# EAGLE board InkTime (EAGLE 9.7.0)
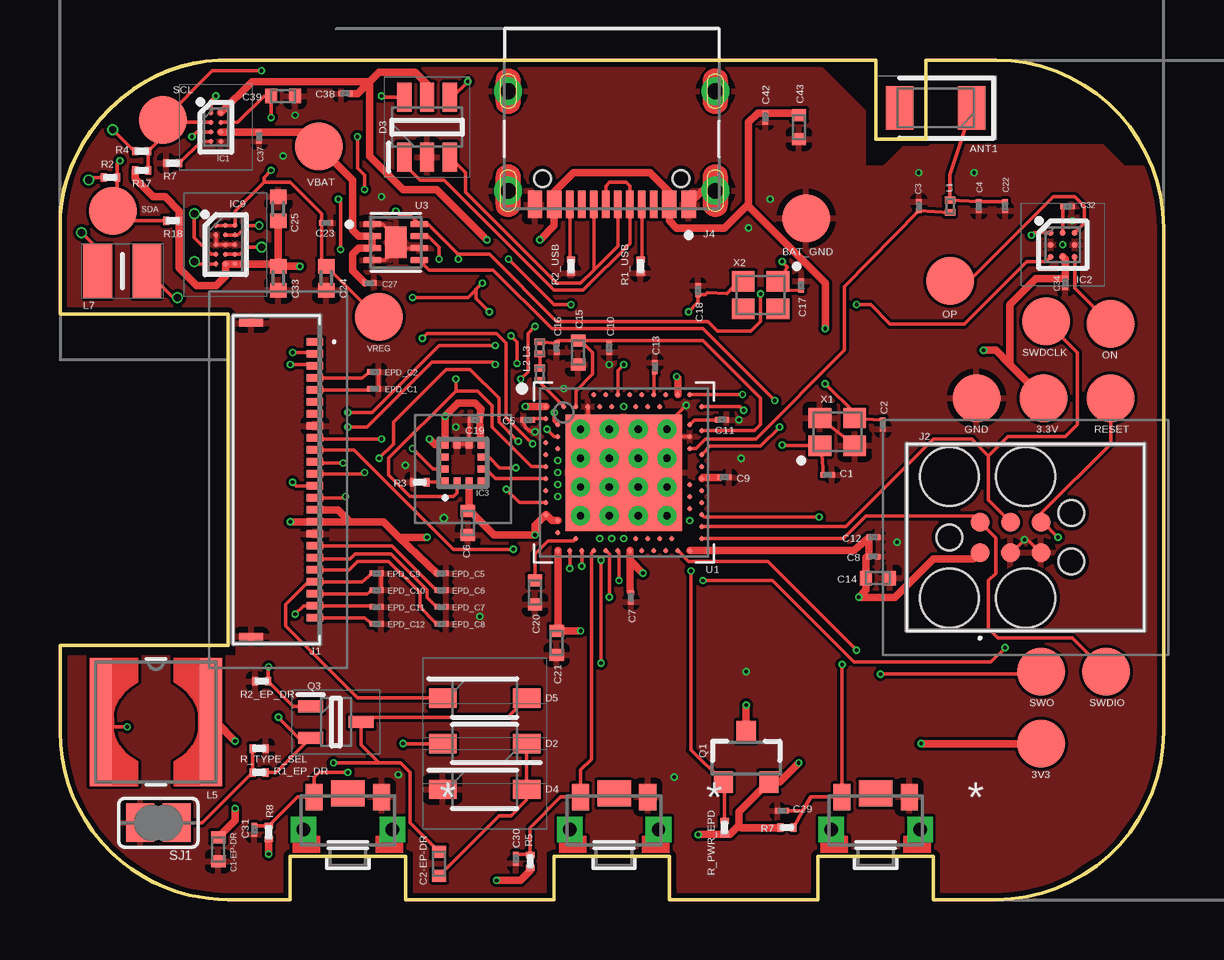
[diagram p0: board, top side]
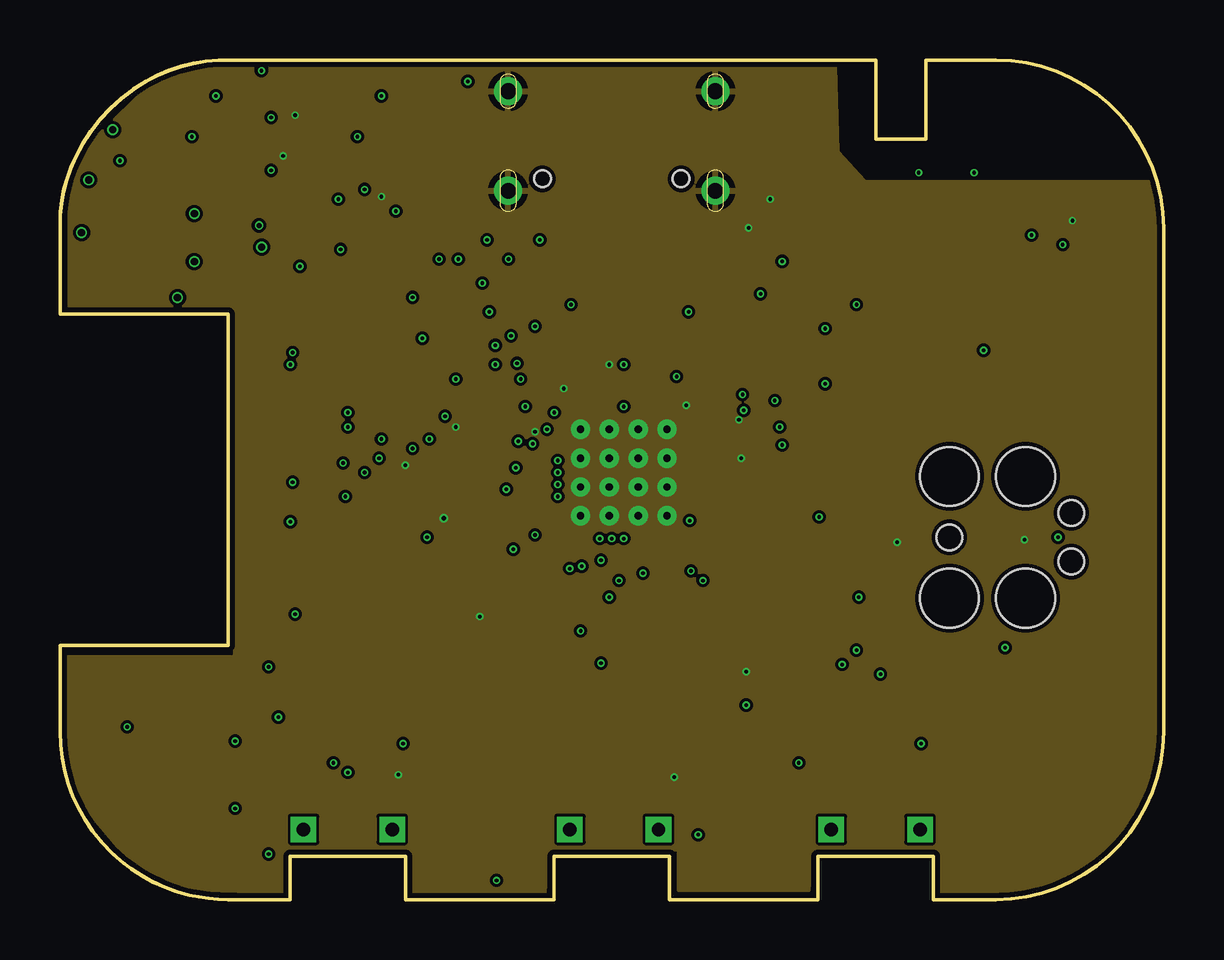
[diagram p1: board, inner layer Route2]
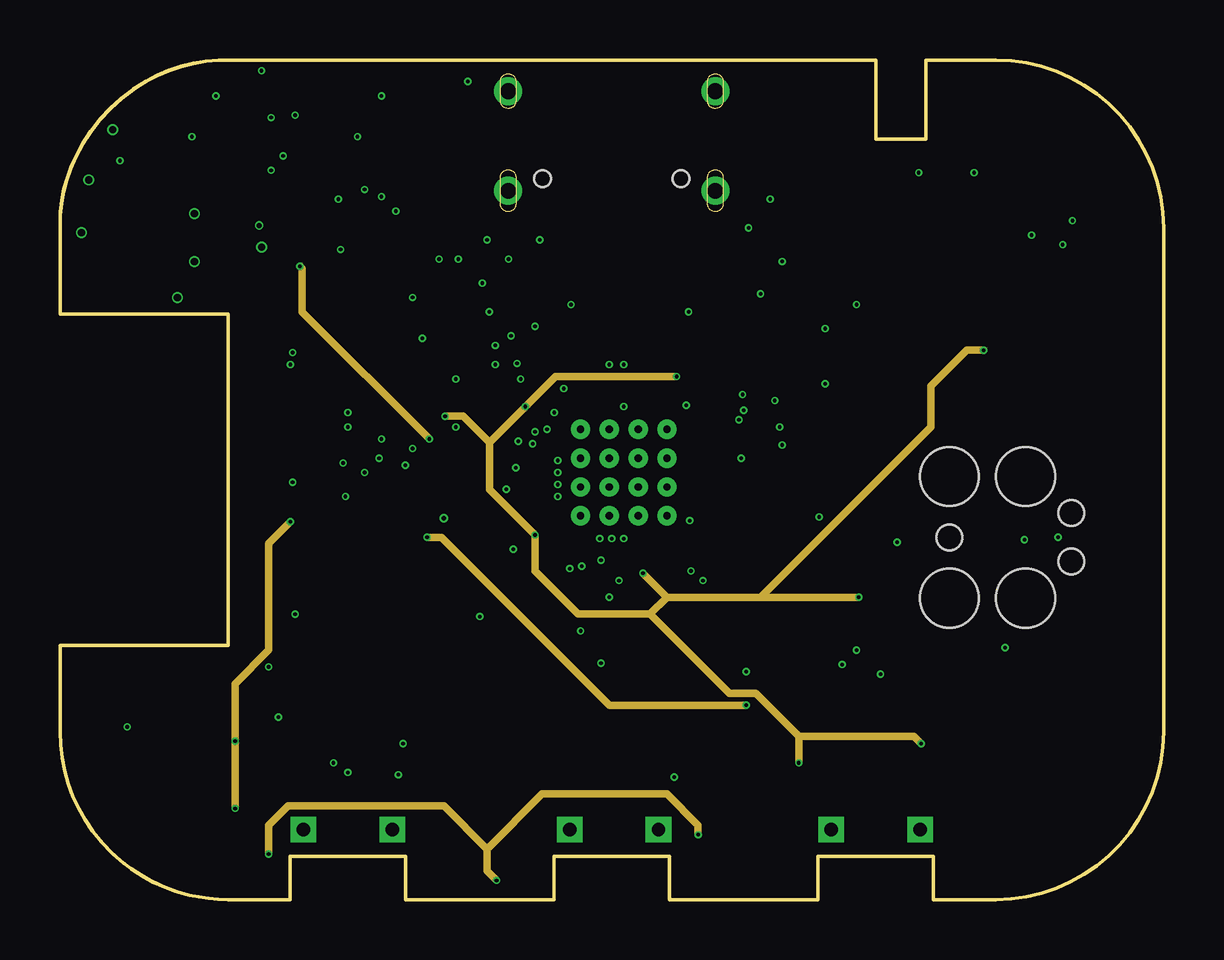
[diagram p2: board, inner layer Route15]
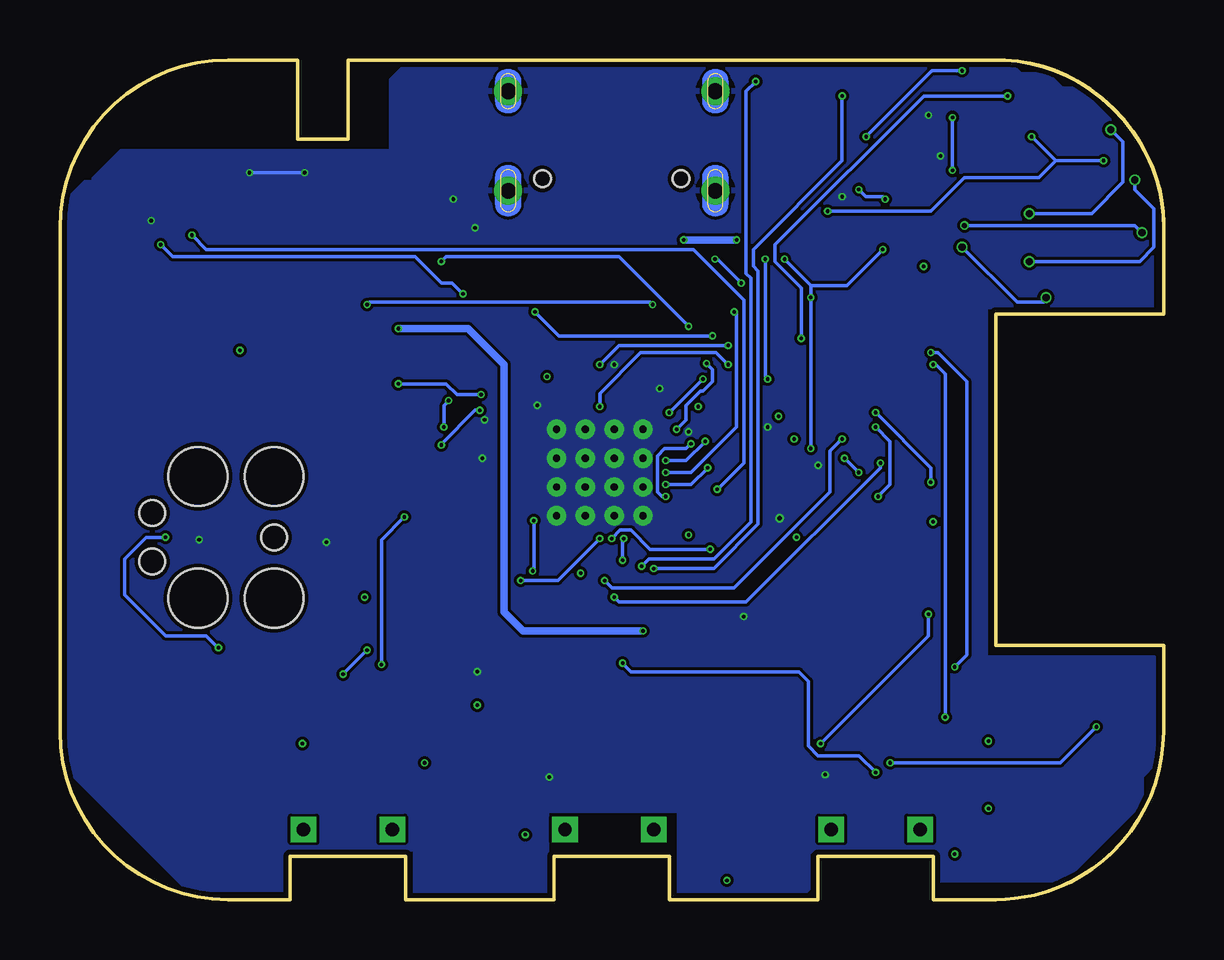
[diagram p3: board, bottom side, seen from below]

Size 46 x 35 mm. Coordinates in mm from the lower left corner, seen from the top.
Outline: 0,28 0,24.4 7,24.4 7,10.6 0,10.6 0,7
Outline: 7,35 arc3 6.6,34.99
Outline: 6.6,34.99 arc26 3.59,34.11
Outline: 3.59,34.11 arc36 0.65,30.95
Outline: 0.65,30.95 arc25 0,28
Outline: 0,7 arc32 1.04,3.32
Outline: 1.04,3.32 arc45 5.39,0.19
Outline: 5.39,0.19 arc13 7,0
Outline: 7,35 34,35 34,31.7 36.1,31.7 36.1,35 39,35 arc-90 46,28 46,7 arc-90 39,0 36.4,0 36.4,1.8 31.6,1.8 31.6,0 25.4,0 25.4,1.8 20.6,1.8 20.6,0 14.4,0 14.4,1.8 9.6,1.8 9.6,0 7,0
Outline: 7,35 6.6,34.99
Outline: 6.6,34.99 arc29 3.59,34.11
Outline: 3.59,34.11 arc33 0.65,30.95
Outline: 0.65,30.95 arc26 0,28.2 0,28
Outline: 0,7 arc32 1.04,3.32
Outline: 1.04,3.32 arc23 2.98,1.27 arc22 5.39,0.19
Outline: 5.39,0.19 arc13 7,0
Copper layers (1+2*15+16): Top 0.035mm / dielectric 1.6mm / Route2 0.035mm / dielectric 0.15mm / Route15 0.035mm / dielectric 0.2mm / Bottom 0.035mm
Design rules "jlcpcb-2layers.dru *": minimum track width 5mil, minimum drill 0.15mm, track to track 5mil, track to pad 5mil, pad to pad 5mil, via to via 5mil, smd to smd 5mil, copper to edge 0.2mm, drill to drill 0.15mm, minimum pad ring 10mil, minimum via ring 0.075mm, stop-mask expansion 4mil, vias tented up to drill 999mm, thermal gap 10mil

## Footprints (pad centres in the part's own frame; a part is rotated, then mirrored left to right if it is on the bottom)
HECTOR_WATCH_1_TP20R = smd 2 x 2: TP 0,0
2450AT18B100E_ANTC3216X140N = smd 1.15 x 1.8: 1 -1.5,0; 2 1.5,0
GRM011R60J152KE01L_2_CAPC0201X13N = smd 0.22 x 0.23: 1 -0.185,0; 2 0.185,0
NORDIC_NRF_2_RESC0402_L = smd 0.5 x 0.6: 1 -0.5,0; 2 0.5,0
PERFECT_0402_0402 = smd 0.6 x 0.7: 1 -0.5,0; 2 0.5,0
ESP32_C6_LIBRARY_5_SOD3716X135N = smd 1.15 x 0.8: 1 -1.75,0; 2 1.75,0
ESP32_C6_LIBRARY_3_SOT95P280X145-6N = smd 1.2 x 0.6: 1 -1.25,0.95; 2 -1.25,0; 3 -1.25,-0.95; 4 1.25,-0.95; 5 1.25,0; 6 1.25,0.95
BQ25180YBGR_BGA8C40P2X4_100X155X50 = smd 0.2 x 0.2: A1 -0.2,0.6; A2 0.2,0.6; B1 -0.2,0.2; B2 0.2,0.2; C1 -0.2,-0.2; C2 0.2,-0.2; D1 -0.2,-0.6; D2 0.2,-0.6
DRV2605YZFR_BGA9C50P3X3_144X144X62 = smd 0.25 x 0.25: A1 -0.5,0.5; A2 0,0.5; A3 0.5,0.5; B1 -0.5,0; B2 0,0; B3 0.5,0; C1 -0.5,-0.5; C2 0,-0.5; C3 0.5,-0.5
BMA423_BMA423 = smd 0.3 x 0.35: 1 -0.75,-0.775; 2 -0.25,-0.775; 3 0.25,-0.775; 4 0.75,-0.775; 7 0.75,0.775; 8 0.25,0.775; 9 -0.25,0.775; 10 -0.75,0.775 | smd 0.35 x 0.3: 5 0.775,-0.25; 6 0.775,0.25; 11 -0.775,0.25; 12 -0.775,-0.25
RT6160AWSC_BGA15C40P3X5_140X230X60 = smd 0.216 x 0.216: A1 -0.4,0.8; A2 0,0.8; A3 0.4,0.8; B1 -0.4,0.4; B2 0,0.4; B3 0.4,0.4; C1 -0.4,0; C2 0,0; C3 0.4,0; D1 -0.4,-0.4; D2 0,-0.4; D3 0.4,-0.4; E1 -0.4,-0.8; E2 0,-0.8; E3 0.4,-0.8
503480-2400_5034802400 = smd 0.3 x 0.7: 1 -5.75,1.525; 2 -5.25,1.525; 3 -4.75,1.525; 4 -4.25,1.525; 5 -3.75,1.525; 6 -3.25,1.525; 7 -2.75,1.525; 8 -2.25,1.525; 9 -1.75,1.525; 10 -1.25,1.525; 11 -0.75,1.525; 12 -0.25,1.525; 13 0.25,1.525; 14 0.75,1.525; 15 1.25,1.525; 16 1.75,1.525; 17 2.25,1.525; 18 2.75,1.525; 19 3.25,1.525; 20 3.75,1.525; 21 4.25,1.525; 22 4.75,1.525; 23 5.25,1.525; 24 5.75,1.525 | smd 0.3 x 1: MP1 -6.54,-1.125; MP2 6.54,-1.125
TC2030-IDC_TC2030IDC = smd 0.783 x 0.783: 1 -0.953,-0.635; 2 -0.953,0.635; 3 0.317,-0.635; 4 0.317,0.635; 5 1.588,-0.635; 6 1.588,0.635 | hole 2.451: -2.223,-2.54; -2.223,2.54; 0.952,-2.54; 0.952,2.54 | hole 1.067: -2.223,0; 2.857,-1.016; 2.857,1.016
KH-TYPE-C-16P_KINGHELM_KH-TYPE-C-16P = smd 0.6 x 1.15: A1_B12 -3.2,4.725; A4_B9 -2.4,4.725; A9_B4 2.4,4.725; A12_B1 3.2,4.725 | smd 0.3 x 1.15: A5 -1.25,4.725; A6 -0.25,4.725; A7 0.25,4.725; A8 1.25,4.725; B5 1.75,4.725; B6 0.75,4.725; B7 -0.75,4.725; B8 -1.75,4.725 | drill 0.65 pad 1.05: SH1 -4.32,0; SH2 4.32,0; SH3 -4.32,4.15; SH4 4.32,4.15 | hole 0.7: -2.89,3.65; 2.89,3.65
NORDIC_NRF_2_RESC0201_L = smd 0.28 x 0.43: 1 -0.255,0; 2 0.255,0
ESP32_C6_LIBRARY_2_IND_4828-WE-TPC_WRE = smd 0.9 x 5.3: 1 -2.286,0; 2 2.286,0
MLP2016SR47MT0S1_INDC2016X100N = smd 1.2 x 2.2: 1 -1.028,0; 2 1.028,0
ESP32_C6_LIBRARY_4_ESP32_C6_LIBRARY_4_ESP32_C6_LIBRARY_4_ESP32_C6_LIBRARY_4_ESP32_WROVER_SPARKFUN-DISCRETESEMI_SOT23-3 = smd 0.8 x 0.9: 1 -0.95,-1; 2 0.95,-1; 3 0,1.1
ESP32_C6_LIBRARY_6_SOT65P210X110-3N = smd 1.05 x 0.5: 1 -1.05,0.65; 2 -1.05,-0.65; 3 1.05,0
ERA-1AEB3401C_0201 = smd 0.35 x 0.25: 1 0,0.275; 2 0,-0.275
ESP32_C6_LIBRARY_7_JUMPER_SJ = smd 1.168 x 1.6: 1 -0.762,0; 2 0.762,0
2025-10-22_07-23-44_LIBRARY_SW_EVP-AKE31A_PAN = smd 0.711 x 1.092: 1 -1.4,-0.972; 2 1.4,-0.972 | drill 0.559 pad 0.914 square: 3 -1.848,0.381; 4 1.848,0.381 | smd 1.397 x 1.092: 5 0,-1.124
NORDIC_NRF_4_AQFN50P700X700X85_HS-74N = smd 4.85 x 4.85: P$74 0,0 | drill 0.3 pad 0.6: P$75 -1.8,1.8; P$76 -0.6,1.8; P$77 0.6,1.8; P$78 1.8,1.8; P$79 -1.8,0.6; P$80 -0.6,0.6; P$81 0.6,0.6; P$82 1.8,0.6; P$83 -1.8,-0.6; P$84 -0.6,-0.6; P$85 0.6,-0.6; P$86 1.8,-0.6; P$87 -1.8,-1.8; P$88 -0.6,-1.8; P$89 0.6,-1.8; P$90 1.8,-1.8 | smd 0.2 x 0.2: P$A8 -1.25,3.25; P$A10 -0.75,3.25; P$A12 -0.25,3.25; P$A14 0.25,3.25; P$A16 0.75,3.25; P$A18 1.25,3.25; P$A20 1.75,3.25; P$A22 2.25,3.25; P$A23 2.75,3.25; P$AA24 3.25,-2.25; P$AB2 -2.75,-2.5; P$AC5 -2,-2.75; P$AC9 -1,-2.75; P$AC11 -0.5,-2.75; P$AC13 0,-2.75; P$AC15 0.5,-2.75; P$AC17 1,-2.75; P$AC19 1.5,-2.75; P$AC21 2,-2.75; P$AC24 3.25,-2.75; P$AD2 -2.75,-3.25; P$AD4 -2.25,-3.25; P$AD6 -1.75,-3.25; P$AD8 -1.25,-3.25; P$AD10 -0.75,-3.25; P$AD12 -0.25,-3.25; P$AD14 0.25,-3.25; P$AD16 0.75,-3.25; P$AD18 1.25,-3.25; P$AD20 1.75,-3.25; P$AD22 2.25,-3.25; P$AD23 2.75,-3.25; P$B1 -3.25,2.75; P$B3 -2.5,2.75; P$B5 -2,2.75; P$B7 -1.5,2.75; P$B9 -1,2.75; P$B11 -0.5,2.75; P$B13 0,2.75; P$B15 0.5,2.75; P$B17 1,2.75; P$B19 1.5,2.75; P$B24 3.25,2.75; P$C1 -3.25,2.25; P$D2 -2.75,2; P$D23 2.75,2; P$E24 3.25,1.75; P$F2 -2.75,1.5; P$F23 2.75,1.5; P$G1 -3.25,1.25; P$H2 -2.75,1; P$H23 2.75,1; P$J1 -3.25,0.75; P$J24 3.25,0.75; P$K2 -2.75,0.5; P$L1 -3.25,0.25; P$L24 3.25,0.25; P$M2 -2.75,0; P$N1 -3.25,-0.25; P$N24 3.25,-0.25; P$P2 -2.75,-0.5; P$P23 2.75,-0.5; P$R1 -3.25,-0.75; P$R24 3.25,-0.75; P$T2 -2.75,-1; P$T23 2.75,-1; P$U1 -3.25,-1.25; P$U24 3.25,-1.25; P$V23 2.75,-1.5; P$W1 -3.25,-1.75; P$W24 3.25,-1.75; P$Y2 -2.75,-2; P$Y23 2.75,-2
ESP32_C6_LIBRARY_SON50P200X200X80-9N = smd 0.76 x 0.27: 1 -0.985,0.75; 2 -0.985,0.25; 3 -0.985,-0.25; 4 -0.985,-0.75; 5 0.985,-0.75; 6 0.985,-0.25; 7 0.985,0.25; 8 0.985,0.75 | smd 0.9 x 1.3: 9 0,0
NORDIC_NRF_BT-XTAL_2016_N = smd 0.95 x 0.85: 1 -0.725,-0.575; 2 0.725,-0.575; 3 0.725,0.575; 4 -0.725,0.575

## Placement (x,y rotation side)
3.3V  HECTOR_WATCH_1_TPTP20R  [HECTOR_WATCH_1_TP20R]  41,20.9 0 top
3V3  HECTOR_WATCH_1_TPTP20R  [HECTOR_WATCH_1_TP20R]  40.9,6.5 0 top
ANT1  2450AT18B100E  [2450AT18B100E_ANTC3216X140N]  36.5,33 180 top
BAT_GND  HECTOR_WATCH_1_TPTP20R  [HECTOR_WATCH_1_TP20R]  31.1,28.4 0 top
C1  12pF  [GRM011R60J152KE01L_2_CAPC0201X13N]  32,17.7 0 top
C1-EP-DR  10μF  [NORDIC_NRF_2_RESC0402_L]  6.6,2.1 270 top
C2  12pF  [GRM011R60J152KE01L_2_CAPC0201X13N]  34.3,19.8 270 top
C2-EP-DR  4.7μF/25V  [NORDIC_NRF_2_RESC0402_L]  15.8,1.5 90 top
C3  1pF  [GRM011R60J152KE01L_2_CAPC0201X13N]  35.8,28.9 90 top
C4  1pF  [GRM011R60J152KE01L_2_CAPC0201X13N]  38.3,28.9 270 top
C5  100nF  [GRM011R60J152KE01L_2_CAPC0201X13N]  19.5,20 180 top
C6  4.7μF  [NORDIC_NRF_2_RESC0402_L]  17,15.7 270 top
C7  100nF  [GRM011R60J152KE01L_2_CAPC0201X13N]  23.8,12.6 270 top
C8  100nF  [GRM011R60J152KE01L_2_CAPC0201X13N]  33.9,14.3 0 top
C9  820pF  [GRM011R60J152KE01L_2_CAPC0201X13N]  27.7,17.6 0 top
C10  N.C.  [GRM011R60J152KE01L_2_CAPC0201X13N]  22.9,23 270 top
C11  100pF  [GRM011R60J152KE01L_2_CAPC0201X13N]  27.6,20 0 top
C12  100nF  [GRM011R60J152KE01L_2_CAPC0201X13N]  33.9,15.1 0 top
C13  N.C.  [GRM011R60J152KE01L_2_CAPC0201X13N]  24.8,22.2 90 top
C14  4.7μF  [NORDIC_NRF_2_RESC0402_L]  34.1,13.4 0 top
C15  1.0μF  [NORDIC_NRF_2_RESC0402_L]  21.6,22.8 270 top
C16  47nF  [GRM011R60J152KE01L_2_CAPC0201X13N]  20.7,23 270 top
C17  12pF  [GRM011R60J152KE01L_2_CAPC0201X13N]  30.9,25.6 270 top
C18  12pF  [GRM011R60J152KE01L_2_CAPC0201X13N]  26.6,25.4 270 top
C19  100nF  [GRM011R60J152KE01L_2_CAPC0201X13N]  17.3,20 180 top
C20  4.7μF  [NORDIC_NRF_2_RESC0402_L]  19.8,12.8 270 top
C21  4.7μF  [NORDIC_NRF_2_RESC0402_L]  20.7,10.7 270 top
C22  N.C.  [GRM011R60J152KE01L_2_CAPC0201X13N]  39.4,28.9 270 top
C23  0.1uF  [GRM011R60J152KE01L_2_CAPC0201X13N]  11.1,28.2 0 top
C24  10uF  [PERFECT_0402_0402]  11.1,25.9 90 top
C25  22uF  [PERFECT_0402_0402]  9.1,28.8 270 top
C27  0.1uF  [GRM011R60J152KE01L_2_CAPC0201X13N]  12.9,25.7 180 top
C29  1uF  [GRM011R60J152KE01L_2_CAPC0201X13N]  30.1,3.7 0 top
C30  1uF  [GRM011R60J152KE01L_2_CAPC0201X13N]  19,1.7 90 top
C31  1uF  [GRM011R60J152KE01L_2_CAPC0201X13N]  8.1,2.9 90 top
C32  1uF  [GRM011R60J152KE01L_2_CAPC0201X13N]  42,28.9 180 top
C33  22uF  [PERFECT_0402_0402]  9.1,25.9 90 top
C34  0.1uF  [GRM011R60J152KE01L_2_CAPC0201X13N]  41.9,25.7 90 top
C37  1uF  [GRM011R60J152KE01L_2_CAPC0201X13N]  8.3,31.8 90 top
C38  1uF  [GRM011R60J152KE01L_2_CAPC0201X13N]  11.9,33.6 0 top
C39  10uF  [NORDIC_NRF_2_RESC0402_L]  9.3,33.5 0 top
C42  0.1uF  [GRM011R60J152KE01L_2_CAPC0201X13N]  29.4,32.6 90 top
C43  4.7μF  [NORDIC_NRF_2_RESC0402_L]  30.8,32.2 270 top
D2  MBR0530  [ESP32_C6_LIBRARY_5_SOD3716X135N]  17.7,6.5 180 top
D3  USBLC6-2SC6Y  [ESP32_C6_LIBRARY_3_SOT95P280X145-6N]  15.3,32.2 90 top
D4  MBR0530  [ESP32_C6_LIBRARY_5_SOD3716X135N]  17.7,4.6 0 top
D5  MBR0530  [ESP32_C6_LIBRARY_5_SOD3716X135N]  17.7,8.4 0 top
EPD_C1  1uF/50V  [GRM011R60J152KE01L_2_CAPC0201X13N]  13.1,21.3 180 top
EPD_C2  1uF/50V  [GRM011R60J152KE01L_2_CAPC0201X13N]  13.1,22 180 top
EPD_C5  0.1uF/50V  [GRM011R60J152KE01L_2_CAPC0201X13N]  15.9,13.6 180 top
EPD_C6  1uF/50V  [GRM011R60J152KE01L_2_CAPC0201X13N]  15.9,12.9 180 top
EPD_C7  1uF/50V  [GRM011R60J152KE01L_2_CAPC0201X13N]  15.9,12.2 180 top
EPD_C8  1uF/50V  [GRM011R60J152KE01L_2_CAPC0201X13N]  15.9,11.5 180 top
EPD_C9  1uF/50V  [GRM011R60J152KE01L_2_CAPC0201X13N]  13.2,13.6 180 top
EPD_C10  1uF/50V  [GRM011R60J152KE01L_2_CAPC0201X13N]  13.2,12.9 180 top
EPD_C11  1uF/50V  [GRM011R60J152KE01L_2_CAPC0201X13N]  13.2,12.2 180 top
EPD_C12  1uF/50V  [GRM011R60J152KE01L_2_CAPC0201X13N]  13.2,11.5 180 top
GND  HECTOR_WATCH_1_TPTP20R  [HECTOR_WATCH_1_TP20R]  38.2,20.9 0 top
IC1  BQ25180YBGR  [BQ25180YBGR_BGA8C40P2X4_100X155X50]  6.5,32.2 0 top
IC2  DRV2605YZFR  [DRV2605YZFR_BGA9C50P3X3_144X144X62]  41.8,27.3 0 top
IC3  BMA423  [BMA423_BMA423]  16.8,18.2 0 top
IC9  RT6160AWSC  [RT6160AWSC_BGA15C40P3X5_140X230X60]  6.9,27.3 0 top
J1  503480-2400  [503480-2400_5034802400]  9.1,17.5 270 top
J2  TC2030-IDC  [TC2030-IDC_TC2030IDC]  39.3,15.1 0 top
J4  KH-TYPE-C-16P  [KH-TYPE-C-16P_KINGHELM_KH-TYPE-C-16P]  23,33.7 180 top
L1  3.9nH  [NORDIC_NRF_2_RESC0201_L]  37.1,28.9 90 top
L2  10μH  [NORDIC_NRF_2_RESC0201_L]  20,21.9 90 top
L3  15nH  [NORDIC_NRF_2_RESC0201_L]  20,23 90 top
L5  68uH  [ESP32_C6_LIBRARY_2_IND_4828-WE-TPC_WRE]  4,7.4 0 top
L7  FTC252012SR47MBCA  [MLP2016SR47MT0S1_INDC2016X100N]  2.6,26.2 0 top
ON  HECTOR_WATCH_1_TPTP20R  [HECTOR_WATCH_1_TP20R]  43.8,24 0 top
OP  HECTOR_WATCH_1_TPTP20R  [HECTOR_WATCH_1_TP20R]  37.1,25.8 0 top
Q1  20V/4.2A/52mΩ/1.4W  [ESP32_C6_LIBRARY_4_ESP32_C6_LIBRARY_4_ESP32_C6_LIBRARY_4_ESP32_C6_LIBRARY_4_ESP32_WROVER_SPARKFUN-DISCRETESEMI_SOT23-3]  28.6,5.9 0 top
Q3  SI1308EDL-T1-GE3  [ESP32_C6_LIBRARY_6_SOT65P210X110-3N]  11.5,7.4 0 top
R1_EP_DR  0.47  [ERA-1AEB3401C_0201]  8.3,5.3 90 top
R1_USB  5K1  [ERA-1AEB3401C_0201]  24.2,26.4 180 top
R2  0  [ERA-1AEB3401C_0201]  2.1,30.1 90 top
R2_EP_DR  10K  [ERA-1AEB3401C_0201]  8.4,9.1 90 top
R2_USB  5K1  [ERA-1AEB3401C_0201]  21.3,26.4 0 top
R3  0  [ERA-1AEB3401C_0201]  15,17.4 270 top
R4  0  [ERA-1AEB3401C_0201]  3.4,31.2 90 top
R5  10k  [ERA-1AEB3401C_0201]  19.6,1.6 0 top
R7  10k  [ERA-1AEB3401C_0201]  30.3,3 270 top
R8  10k  [ERA-1AEB3401C_0201]  8.7,2.8 0 top
R9  10K  [ERA-1AEB3401C_0201]  4.7,30.7 90 top
R17  3K3  [ERA-1AEB3401C_0201]  3.4,30.4 90 top
R18  3K3  [ERA-1AEB3401C_0201]  4.7,28.3 270 top
R_PWR_EPD  10K  [ERA-1AEB3401C_0201]  27.7,3 0 top
R_TYPE_SEL  2.2  [ERA-1AEB3401C_0201]  8.3,6.3 270 top
RESET  HECTOR_WATCH_1_TPTP20R  [HECTOR_WATCH_1_TP20R]  43.8,20.9 0 top
SDA  HECTOR_WATCH_1_TPTP20R  [HECTOR_WATCH_1_TP20R]  2.2,28.7 0 top
SJ1  [ESP32_C6_LIBRARY_7_JUMPER_SJ]  4.1,3.2 0 top
SW_DN  2025-10-22_07-23-44_LIBRARY_EVP-AKE31ASW_EVP-AKE31A_PAN  [2025-10-22_07-23-44_LIBRARY_SW_EVP-AKE31A_PAN]  34,3.3 180 top
SW_ENT  2025-10-22_07-23-44_LIBRARY_EVP-AKE31ASW_EVP-AKE31A_PAN  [2025-10-22_07-23-44_LIBRARY_SW_EVP-AKE31A_PAN]  12,3.3 180 top
SW_UP  2025-10-22_07-23-44_LIBRARY_EVP-AKE31ASW_EVP-AKE31A_PAN  [2025-10-22_07-23-44_LIBRARY_SW_EVP-AKE31A_PAN]  23.1,3.3 180 top
SWDCLK  HECTOR_WATCH_1_TPTP20R  [HECTOR_WATCH_1_TP20R]  41.1,24.1 0 top
SWDIO  HECTOR_WATCH_1_TPTP20R  [HECTOR_WATCH_1_TP20R]  43.6,9.5 0 top
SWO  HECTOR_WATCH_1_TPTP20R  [HECTOR_WATCH_1_TP20R]  40.9,9.5 0 top
TP_SCL  HECTOR_WATCH_1_TPTP20R  [HECTOR_WATCH_1_TP20R]  4.3,32.5 0 top
U1  NRF52840_QF  [NORDIC_NRF_4_AQFN50P700X700X85_HS-74N]  23.5,17.8 0 top
U3  MAX17048G+T10  [ESP32_C6_LIBRARY_SON50P200X200X80-9N]  14,27.4 0 top
VBAT  HECTOR_WATCH_1_TPTP20R  [HECTOR_WATCH_1_TP20R]  10.8,31.4 0 top
VREG  HECTOR_WATCH_1_TPTP20R  [HECTOR_WATCH_1_TP20R]  13.3,24.3 0 top
X1  32MHz  [NORDIC_NRF_BT-XTAL_2016_N]  32.4,19.5 0 top
X2  32.768kHz  [NORDIC_NRF_BT-XTAL_2016_N]  29.2,25.2 180 top

## Library data of the parts
3.3V 3V3 BAT_GND C1 C1-EP-DR C2 C2-EP-DR C3-C22 C24 C25 C33 C39 C43 EPD_C1 EPD_C2 EPD_C5-EPD_C12 GND L1-L3 ON OP R1_EP_DR R1_USB R2_EP_DR R2_USB R5 R7 R8 R_PWR_EPD R_TYPE_SEL RESET SDA SJ1 SWDCLK SWDIO SWO TP_SCL U1 VBAT VREG X1 X2 = InkTime_v5
ANT1 = InkTime_v5; ARROW_PART_NUMBER: 2450AT18B100E; ARROW_PRICE-STOCK: https://www.arrow.com/en/products/2450at18b100e/johanson-dielectrics?utm_currency=USD&region=nac; DESCRIPTION: Antennas 2.45GHz ANTENNA; HEIGHT: 1.4mm; MANUFACTURER_NAME: JOHANSON TECHNOLOGY; MANUFACTURER_PART_NUMBER: 2450AT18B100E; MOUSER_PART_NUMBER: 609-2450AT18B100E; MOUSER_PRICE-STOCK: https://www.mouser.co.uk/ProductDetail/Johanson-Technology/2450AT18B100E?qs=yCnrNFeXz%252Bh5MFsFIXGZGA%3D%3D
C23 C27 C29-C32 C34 C37 C38 C42 = InkTime_v5; AVAILABILITY: In Stock; CHECK_PRICES: https://www.snapeda.com/parts/GRM011R60J152KE01L/Murata/view-part/?ref=eda; DESCRIPTION: SMD Capacitor X5R(EIA) with Capacitance: 1500pF Tol. 10%. Rated Voltage: 6.3Vdc; MF: Murata; MP: GRM011R60J152KE01L; PACKAGE: 0201 Murata; PRICE: None; SNAPEDA_LINK: https://www.snapeda.com/parts/GRM011R60J152KE01L/Murata/view-part/?ref=snap
D2 D4 D5 = InkTime_v5; AVAILABILITY: In Stock; CHECK_PRICES: https://www.snapeda.com/parts/MBR0530/Onsemi/view-part/?ref=eda; DESCRIPTION: Diode Schottky 30 V 500mA Surface Mount SOD-123; MF: ON Semiconductor; MP: MBR0530; PACKAGE: SOD-123-2 ON Semiconductor; PRICE: None; PURCHASE-URL: https://www.snapeda.com/api/url_track_click_mouser/?unipart_id=179458&manufacturer=ON Semiconductor&part_name=MBR0530&search_term=None; SNAPEDA_LINK: https://www.snapeda.com/parts/MBR0530/Onsemi/view-part/?ref=snap
D3 = InkTime_v5; AVAILABILITY: In Stock; CHECK_PRICES: https://www.snapeda.com/parts/USBLC6-2SC6Y/STMicroelectronics/view-part/?ref=eda; DESCRIPTION: 17V Clamp 5A (8/20µs) Ipp Tvs Diode Surface Mount SOT-23-6; MF: STMicroelectronics; MP: USBLC6-2SC6Y; PACKAGE: SOT-23-6 STMicroelectronics; PRICE: None; SNAPEDA_LINK: https://www.snapeda.com/parts/USBLC6-2SC6Y/STMicroelectronics/view-part/?ref=snap
IC1 = InkTime_v5; ARROW_PART_NUMBER: BQ25180YBGR; ARROW_PRICE-STOCK: https://www.arrow.com/en/products/bq25180ybgr/texas-instruments?utm_currency=USD&region=nac; DESCRIPTION: Charger IC Lithium Ion/Polymer, Lithium Iron Phosphate 8-DSBGA (1.6x1.1); HEIGHT: 0.5mm; MANUFACTURER_NAME: Texas Instruments; MANUFACTURER_PART_NUMBER: BQ25180YBGR; MOUSER_PART_NUMBER: 595-BQ25180YBGR; MOUSER_PRICE-STOCK: https://www.mouser.co.uk/ProductDetail/Texas-Instruments/BQ25180YBGR?qs=doiCPypUmgEWjAK%252BJAX6Tw%3D%3D
IC2 = InkTime_v5; ARROW_PART_NUMBER: DRV2605YZFR; ARROW_PRICE-STOCK: https://www.arrow.com/en/products/drv2605yzfr/texas-instruments?region=nac; DESCRIPTION: Haptic Driver for ERM/LRA with Built-In Library and Smart Loop Architecture; HEIGHT: 0.625mm; MANUFACTURER_NAME: Texas Instruments; MANUFACTURER_PART_NUMBER: DRV2605YZFR
IC3 = InkTime_v5; ARROW_PART_NUMBER: BMA423; ARROW_PRICE-STOCK: https://www.arrow.com/en/products/bma423/bosch; DESCRIPTION: Accelerometers Triaxial low-g 12bit Acceleration Sensor; HEIGHT: 1mm; MANUFACTURER_NAME: BOSCH; MANUFACTURER_PART_NUMBER: BMA423; MOUSER_PART_NUMBER: 262-BMA423; MOUSER_PRICE-STOCK: https://www.mouser.co.uk/ProductDetail/Bosch-Sensortec/BMA423?qs=HXFqYaX1Q2xC%252BSgeGoX3mg%3D%3D
IC9 = InkTime_v5; DESCRIPTION: Buck-Boost Regulator Positive Output Step-Up/Step-Down I2C DC-DC Controller IC 15-WL-CSP (BSC) (1.4x2.3); HEIGHT: 0.6mm; MANUFACTURER_NAME: RICHTEK; MANUFACTURER_PART_NUMBER: RT6160AWSC; MOUSER_PART_NUMBER: 835-RT6160AWSC; MOUSER_PRICE-STOCK: https://www.mouser.co.uk/ProductDetail/Richtek/RT6160AWSC?qs=amGC7iS6iy%2FLd9PSoixZXQ%3D%3D
J1 = InkTime_v5; DESCRIPTION: FFC & FPC Connectors 0.5mm FPC RA SMT Dual Contact 24Ckt; HEIGHT: 1.87mm; MANUFACTURER_NAME: Molex; MANUFACTURER_PART_NUMBER: 503480-2400; MOUSER_PART_NUMBER: 538-503480-2400; MOUSER_PRICE-STOCK: https://www.mouser.co.uk/ProductDetail/Molex/503480-2400?qs=OAhjpuo3Vu7efIoxFh9AOw%3D%3D
J2 = InkTime_v5; DESCRIPTION: CABLE ADAPTER 6 POS; HEIGHT: 19mm; MANUFACTURER_NAME: Tag Connect; MANUFACTURER_PART_NUMBER: TC2030-IDC
J4 = InkTime_v5; AVAILABILITY: Not in stock; CHECK_PRICES: https://www.snapeda.com/parts/KH-TYPE-C-16P/Kinghelm/view-part/?ref=eda; MF: kinghelm; MP: KH-TYPE-C-16P; PACKAGE: None; PRICE: None; SNAPEDA_LINK: https://www.snapeda.com/parts/KH-TYPE-C-16P/Kinghelm/view-part/?ref=snap
L5 = InkTime_v5; COPYRIGHT: Copyright (C) 2024 Ultra Librarian. All rights reserved.; MANUFACTURER_PART_NUMBER: 744043680; MFR_NAME: Wurth Electronics
L7 = InkTime_v5; DESCRIPTION: SMD / SMT Inductors (Coils), L=0.47?H, L x W x T :; HEIGHT: 1mm; JLCPCB: https://jlcpcb.com/partdetail/6763488-FTC252012SR47MBCA/C5832368; MANUFACTURER_NAME: TDK; MANUFACTURER_PART_NUMBER: FTC252012SR47MBCA
Q1 = InkTime_v5; PROD_ID: TRAN-14388
Q3 = InkTime_v5; AVAILABILITY: In Stock; CHECK_PRICES: https://www.snapeda.com/parts/SI1308EDL-T1-GE3/Vishay+Siliconix/view-part/?ref=eda; DESCRIPTION: Si1308EDL-T1-GE3 N-channel MOSFET Transistor, 1.5 A, 30 V, 3-Pin SC-70 | Siliconix / Vishay SI1308EDL-T1-GE3; MF: Vishay Siliconix; MP: SI1308EDL-T1-GE3; PACKAGE: SOT-323 Vishay Semiconductor; PRICE: None; PURCHASE-URL: https://www.snapeda.com/api/url_track_click_mouser/?unipart_id=274603&manufacturer=Vishay Siliconix&part_name=SI1308EDL-T1-GE3&search_term=None; SNAPEDA_LINK: https://www.snapeda.com/parts/SI1308EDL-T1-GE3/Vishay+Siliconix/view-part/?ref=snap
R2-R4 = InkTime_v5; RESISTANCE: 0
R9 = InkTime_v5; RESISTANCE: 10K
R17 R18 = InkTime_v5; RESISTANCE: 3K3
SW_DN SW_ENT SW_UP = InkTime_v5; COPYRIGHT: Copyright (C) 2025 Ultra Librarian. All rights reserved.; DIGI-KEY_PART_NUMBER_1: P123437TR-ND; DIGI-KEY_PART_NUMBER_2: P123437CT-ND; DIGI-KEY_PART_NUMBER_3: P123437DKR-ND; MANUFACTURER_NAME: Panasonic; MANUFACTURER_PART_NUMBER: EVP-AKE31A
U3 = InkTime_v5; AVAILABILITY: In Stock; CHECK_PRICES: https://www.snapeda.com/parts/MAX17048G+T10/Analog+Devices/view-part/?ref=eda; DESCRIPTION: 3µA 1-Cell/2-Cell Fuel Gauge with ModelGauge; MF: Analog Devices; MP: MAX17048G+T10; PACKAGE: TDFN-8 Maxim; PRICE: None; PURCHASE-URL: https://www.snapeda.com/api/url_track_click_mouser/?unipart_id=329239&manufacturer=Analog Devices&part_name=MAX17048G+T10&search_term=None; SNAPEDA_LINK: https://www.snapeda.com/parts/MAX17048G+T10/Analog+Devices/view-part/?ref=snap

## Nets
3V3 [Power]: 3.3V.TP 3V3.TP C6.1 C7.1 C8.1 C12.1 C14.1 C19.1 C25.2 C33.2 C34.2 IC2.C2 IC3.3 IC3.7 IC3.10 IC9.E2 IC9.E3 J2.1 Q1.2 R5.2 R7.2 R8.2 R17.1 R18.1 R_PWR_EPD.2 U1.P$A22 U1.P$AD14 U1.P$AD23 U1.P$B1 U1.P$W1 U1.P$Y2
3V3/2.4A1 [Power]: C9.1 U1.P$N24
ALERT: U1.P$J24 U3.5
D+: D3.4 U1.P$AD6
D-: D3.6 U1.P$AD4
DEC1: C5.1 U1.P$C1
DEC2: C3.1 L1.1 U1.P$H23
DEC3: C11.1 U1.P$D23
DEC4: ANT1.1 C4.1 C22.1 L1.2
DEC4_6: C10.1 C15.1 C16.1 L3.2 U1.P$B5 U1.P$E24
DN: D3.1 J4.A7 J4.B7
DP: D3.3 J4.A6 J4.B6
EPD_3V3 [Power]: C1-EP-DR.1 EPD_C5.2 J1.15 J1.16 L5.2 Q1.3
EPD_BUSY: J1.9 U1.P$AD12
EPD_CS: J1.12 U1.P$K2
EPD_DC: J1.11 U1.P$AD10
EPD_RST: J1.10 U1.P$AC11
GDR: J1.2 Q3.1 R2_EP_DR.2
GND [Power]: BAT_GND.TP C1-EP-DR.2 C1.2 C2.2 C3.2 C4.2 C5.2 C6.2 C7.2 C8.2 C9.2 C10.2 C11.2 C12.2 C13.2 C14.2 C15.2 C16.2 C17.1 C18.1 C19.2 C20.2 C21.2 C22.2 C23.2 C24.1 C25.1 C27.1 C29.1 C30.1 C31.1 C32.1 C33.1 C34.1 C37.1 C38.1 C39.2 C42.1 C43.2 D3.2 D4.1 EPD_C1.1 EPD_C2.1 EPD_C5.1 EPD_C6.1 EPD_C7.1 EPD_C8.1 EPD_C9.1 EPD_C10.1 EPD_C11.1 EPD_C12.1 GND.TP IC1.D2 IC2.B1 IC2.B3 IC3.8 IC3.9 IC9.B1 IC9.C1 IC9.C2 IC9.C3 J1.8 J1.17 J1.MP1 J1.MP2 J2.3 J2.5 J4.A1_B12 J4.A12_B1 J4.SH1 J4.SH2 J4.SH3 J4.SH4 R1_USB.1 R2_EP_DR.1 R2_USB.2 R3.2 R9.1 R_TYPE_SEL.1 SJ1.1 SW_DN.1 SW_ENT.1 SW_UP.1 U1.P$74 U1.P$75 U1.P$76 U1.P$77 U1.P$78 U1.P$79 U1.P$80 U1.P$81 U1.P$82 U1.P$83 U1.P$84 U1.P$85 U1.P$86 U1.P$87 U1.P$88 U1.P$89 U1.P$90 U1.P$B7 U1.P$F23 U3.1 U3.4 U3.6 U3.9 X1.2 X1.4
HAPTIC_EN: IC2.A1 U1.P$U1
IMU_INT1: IC3.5 U1.P$N1
IMU_INT2: IC3.6 U1.P$P2
LX1: IC9.B2 IC9.B3 L7.1
LX2: IC9.D2 IC9.D3 L7.2
MOSI: J1.14 U1.P$B13
N$1: IC9.D1 R4.1
N$2: IC9.E1 R2.1
N$3: L2.2 L3.1
N$4: C2-EP-DR.2 D5.2 L5.1 Q3.3
N$5: C1.1 U1.P$B24 X1.1
N$6: C2-EP-DR.1 D2.1 D4.2
N$7: R1_EP_DR.1 R_TYPE_SEL.2 SJ1.2
N$8: IC3.1 R3.1
N$9: EPD_C12.2 J1.24
N$10: C13.1 U1.P$A18
N$13: EPD_C2.2 J1.4
N$14: EPD_C1.2 J1.5
N$16: C32.2 IC2.A2
N$18: J4.B5 R2_USB.1
N$19: J4.A5 R1_USB.2
N$21: C20.1 U1.P$AC5
N$28: EPD_C6.2 J1.18
N$29: EPD_C7.2 J1.19
N$30: EPD_C8.2 J1.20
N$32: EPD_C10.2 J1.22
N$40: C2.1 U1.P$A23 X1.3
N$68: L2.1 U1.P$B3
OUT+: IC2.A3 OP.TP
OUT-: IC2.C3 ON.TP
P0.00/XL1: C17.2 U1.P$D2 X2.1
P0.01/XL2: C18.2 U1.P$F2 X2.2
P0.04: U1.P$J1
P0.09: U1.P$L24
P0.13: C30.2 R5.1 SW_UP.2 U1.P$AD8
P0.14: C31.2 R8.1 SW_ENT.2 U1.P$AC9
P0.19: U1.P$AC15
P0.20: U1.P$AD16
P0.21: U1.P$AC17
P0.22: U1.P$AD18
P0.23: U1.P$AC19
P0.24: U1.P$AD20
P0.25: U1.P$AC21
P0.26: U1.P$G1
P0.27: U1.P$H2
P0.28: U1.P$B11
P0.29: U1.P$A10
P0.30: U1.P$B9
P0.31: U1.P$A8
P1.01: Q1.1 R_PWR_EPD.1 U1.P$Y23
P1.02: C29.2 R7.1 SW_DN.2 U1.P$W24
P1.03: U1.P$V23
P1.04: U1.P$U24
P1.05: U1.P$T23
P1.06: U1.P$R24
P1.07: U1.P$P23
P1.09: U1.P$R1
P1.10: U1.P$A20
P1.11: U1.P$B19
P1.12: U1.P$B17
P1.13: U1.P$A16
P1.14: U1.P$B15
P1.15: U1.P$A14
PMIC_INT: IC1.A1 U1.P$T2
PREVGH: D5.1 EPD_C9.2 J1.21
PREVGL: D2.2 EPD_C11.2 J1.23
RESE: J1.3 Q3.2 R1_EP_DR.2
RESET: J2.6 RESET.TP U1.P$AC13
SCK: J1.13 U1.P$A12
SCL: IC1.B1 IC2.C1 IC3.12 R4.2 R17.2 TP_SCL.TP U1.P$M2 U3.7
SDA: IC1.C1 IC2.B2 IC3.2 R2.2 R18.2 SDA.TP U1.P$L1 U3.8
SWDCLK: J2.4 SWDCLK.TP U1.P$AA24
SWDIO: J2.2 SWDIO.TP U1.P$AC24
SWO: SWO.TP U1.P$AD22
TS/MR: IC1.D1 R9.2
VBAT [Power]: C27.2 C37.2 IC1.C2 U3.2 U3.3 VBAT.TP
VBUS: C21.1 C38.2 C42.2 C43.1 D3.5 IC1.A2 J4.A4_B9 J4.A9_B4 U1.P$AD2
VREG: C23.1 C24.2 C39.1 IC1.B2 IC9.A1 IC9.A2 IC9.A3 VREG.TP

## Tracks (layer width: path | path; a pad name or v marks a point on that pad's centre or on a via)
3V3  (via drill 0.15)
  Top 0.305: C33.2 C25.2 | C33.2 9,26.5 IC9.E3 IC9.E2 6.9,26 6.5,25.6 5.7,25.6 4.98,26.32 R18.1 4.98,28.7 4.38,29.3 3.88,29.3 3.12,30.05 R17.1 | 28.3,3.1 28.3,3.65 Q1.2 30,4.9 v30.8,5.7 | 28.3,3.1 27.93,2.72 R_PWR_EPD.2 26.62,2.72 v26.6,2.7 | U1.P$AD14 23.75,14.15 | 23.75,14.15 23.75,12.91 C7.1 | U1.P$AD23 33.09,14.55 C12.1 C8.1 33.6,14.25 C14.1 33.6,12.9 v33.3,12.6 34.8,12.6 36.4,14.2 38.08,14.2 J2.1 | R7.2 28.4,3 28.3,3.1 | IC2.C2 41.9,26.7 C34.2 40.69,25.88 39.6,24.8 39.6,22.3 | 39.6,22.3 3.3V.TP | IC3.7 C19.1 17.55,20.45 17.3,20.7 16.6,20.7 v16.05,20.15 IC3.10 15.62,18.98 v15.4,19.2 | v18.2,0.8 19.2,0.8 19.6,1.2 R5.2 | R8.2 v8.7,1.9 | IC3.3 17.05,16.25 C6.1 17.1,16.2 18.1,15.2 v19.8,15.2 19.8,15.6 U1.P$W1 20.5,15.8 U1.P$Y2 | U1.P$B1 v19.4,20.55 | v10,26.4 C33.2 | v24.3,13.6 23.75,14.15 | U1.P$A22 25.75,21.75 v25.7,21.8 | 3V3.TP v35.9,6.5 | v38.5,22.9 39,22.9 39.6,22.3
  Route15 0.305: v26.6,2.7 26.6,3.1 25.3,4.4 20.1,4.4 17.8,2.1 | 17.8,2.1 17.8,1.2 v18.2,0.8 | v8.7,1.9 8.7,3.1 9.5,3.9 16,3.9 17.8,2.1 | 17.9,19.05 v19.4,20.55 20.65,21.8 v25.7,21.8 | 17.9,19.05 17.9,17.1 v19.8,15.2 19.8,13.7 21.6,11.9 24.6,11.9 | v15.4,19.2 10.1,24.5 10.1,26.3 v10,26.4 | v33.3,12.6 29.2,12.6 | 29.2,12.6 25.3,12.6 | 25.3,12.6 v24.3,13.6 | 25.3,12.6 24.6,11.9 | 24.6,11.9 27.9,8.6 29,8.6 30.8,6.8 | 30.8,6.8 v30.8,5.7 | 30.8,6.8 35.6,6.8 v35.9,6.5 | 29.2,12.6 36.3,19.7 36.3,21.4 37.8,22.9 v38.5,22.9 | v16.05,20.15 16.8,20.15 17.9,19.05
3V3/2.4A1
  Top 0.305: C9.1 26.8,17.6 U1.P$N24
ALERT  (via drill 0.15)
  Top 0.15: U1.P$J24 27.1,18.9 29.2,18.9 v30,19.7 | v29.8,20.8 26.8,23.8 20.5,23.8 18.05,26.25 15.38,26.25 U3.5
  Bottom 0.15: v29.8,20.8 30,20.6 v30,19.7
D+  (via drill 0.15)
  Top 0.15: U1.P$AD6 v21.75,13.9 | v17,34.1 16.35,33.45 D3.4
  Bottom 0.15: v21.75,13.9 21.45,14.2 18.75,14.2 17.2,15.75 17.2,25.9 17.4,26.1 17.4,33.7 v17,34.1
D-  (via drill 0.15)
  Top 0.15: U1.P$AD4 v21.25,13.8 | D3.6 13.45,33.45 v13.4,33.5
  Bottom 0.15: v21.25,13.8 18.75,13.8 16.9,15.65 16.9,26.2 17.1,26.4 17.1,27.1 13.4,30.8 v13.4,33.5
DEC1
  Top 0.15: U1.P$C1 19.8,20.05 C5.1
DEC2
  Top 0.15: L1.1 C3.1 32.7,25.55 32.7,22.9 29,19.2 26.9,19.2 26.5,18.8 U1.P$H23
DEC3
  Top 0.15: C11.1 26.45,20 U1.P$D23
DEC4
  Top 0.15: C22.1 C4.1 L1.2 37.1,30.21 ANT1.1
DEC4_6
  Top 0.15: L3.2 C16.1 20.75,23.3 C15.1 21.7,23.3 | C10.1 22.89,23.3 | 22.89,23.3 21.7,23.3 | U1.P$B5 21.5,21.2 22.2,21.9 22.2,22.8 21.7,23.3 | U1.P$E24 28.95,19.55 29.2,19.8 29.2,20.9 26.8,23.3 22.89,23.3
DN
  Top 0.15: J4.A7 22.75,29.75 22.9,29.9 23.6,29.9 23.75,29.75 J4.B7 23.75,27.35 21.8,25.4 20.6,25.4 16,30 15,30 14.35,30.65 D3.1
DP
  Top 0.15: D3.3 16.9,30.3 16.9,29.5 20.7,25.7 21.7,25.7 22.25,26.25 | 22.25,26.25 J4.B6 | J4.A6 23.25,27.25 22.25,26.25
EPD_3V3  (via drill 0.15)
  Top 0.305: EPD_C5.2 14.14,15.1 | 14.14,15.1 13.49,15.75 12.1,15.75 | 12.1,15.75 J1.16 v9.6,15.75 | Q1.3 v28.6,8.1 | v15.3,15.1 14.14,15.1 | C1-EP-DR.1 7.3,3.3 v7.3,3.8 | J1.15 11.6,16.25 12.1,15.75 | v7.3,6.6 6.5,7.4 L5.2
  Route15 0.305: v28.6,8.1 22.9,8.1 15.9,15.1 v15.3,15.1 | v7.3,3.8 v7.3,6.6 7.3,9 8.7,10.4 8.7,14.85 v9.6,15.75
EPD_BUSY  (via drill 0.15)
  Top 0.15: U1.P$AD12 23.3,14.5 v23.3,13.3 | v13.4,19.2 10.68,19.2 J1.9
  Bottom 0.15: v13.4,19.2 13.9,18.7 13.9,17 17.9,13 23,13 v23.3,13.3
EPD_CS  (via drill 0.15)
  Top 0.15: v19.1,19.1 18.3,19.9 18.3,20.9 17.1,22.1 16.1,22.1 13.9,19.9 13.9,19 v13.3,18.4 | v12.7,17.8 12.65,17.75 J1.12
  Bottom 0.15: U1.P$K2 19.9,18.3 v19.1,19.1 | v13.3,18.4 v12.7,17.8
  other vias: 20.75,18.3
EPD_DC  (via drill 0.15)
  Top 0.15: U1.P$AD10 22.9,14.4 v22.9,12.6 | v11.8,18.2 10.68,18.2 J1.11
  Bottom 0.15: v22.9,12.6 22.7,12.4 17.4,12.4 11.8,18 v11.8,18.2
EPD_RST  (via drill 0.15)
  Top 0.15: v18.9,14.6 16.4,14.6 12.25,18.75 J1.10
  Bottom 0.15: U1.P$AC11 22.65,15.4 22.2,15.4 21.4,14.6 v18.9,14.6
  other vias: 23,15.05
GDR  (via drill 0.15)
  Top 0.15: Q3.1 9.72,8.05 R2_EP_DR.2 8.68,9.68 v8.7,9.7 | v9.7,22.8 10.57,22.8 J1.2
  Bottom 0.15: v8.7,9.7 8.2,10.2 8.2,21.6 9.4,22.8 v9.7,22.8
GND  (via drill 0.15, 0.2)
  Top 0.15: IC9.C3 IC9.C2 IC9.C1 IC9.B1 | IC3.8 17.05,19 | 17.05,19 17.05,20 C19.2 | IC3.9 16.57,19 17.05,19 | C5.2 C5.2 arc90 v19.8,19.5 | EPD_C9.1 EPD_C10.1 | U3.1 13.45,28.15 13.7,27.9 13.7,27.7 U3.9 | U3.4 13.55,26.65 14,27.1 U3.9 | U3.6 14.25,27.15 U3.9 | EPD_C1.1 EPD_C2.1 | U1.P$B7 22,19.9 U1.P$75 | v26.1,20.6 25.3,19.8 | 25.3,19.8 U1.P$78 25.6,19.3 U1.P$F23 | U1.P$74 23.5,18 25.3,19.8 | J2.3 39.66,14.46 v40.2,15 40.35,15 J2.5 | X1.2 X1.4
  Top 0.152: D4.1 15.95,4.5
  Top 0.305: J4.A1_B12 26.77,29.55 J4.SH3
  Bottom 0.152: v35.8,30.3 v38.1,30.3
  other vias: 16,15.9 25.6,5.1 28.6,9.5 9.8,32.7 9.3,31 29.6,29.2 28.7,28 14.1,5.2 16.5,19.7 14.4,18.1 22.9,22.3 17.5,11.8 13.4,29.3 42.2,28.3 21,21.3 28.3,20 28.4,18.4 34.9,14.9
  pour Bottom: 14.78,0.43 14.93,0.28 20.22,0.28 20.22,0.27 20.22,3.62 20.24,3.64 20.26,3.66 20.28,3.68 25.62,3.68 25.64,3.66 25.66,3.64 25.68,3.62 25.68,0.28 31.22,0.28 31.22,2.02 31.24,2.04 31.26,2.06 31.28,2.08 36.62,2.08 36.64,2.06 36.66,2.04 36.68,2.02 36.68,0.38 40.67,0.38 45.72,5.43 45.72,29.17 44.97,29.92 44.68,29.92 44.66,29.94 44.64,29.96 44.62,29.98 44.62,30.02 44.64,30.04 44.64,30.05 43.47,31.22 32.28,31.22 32.26,31.24 32.24,31.26 32.22,31.28 32.22,34.17 31.67,34.72 6.23,34.72 5.94,34.44 5.92,34.42 4.83,34.42 4.24,33.84 4.22,33.82 3.53,33.82 1.18,31.47 1.18,30.98 1.16,30.96 0.48,30.27 0.48,24.68 7.32,24.68 7.34,24.66 7.36,24.64 7.38,24.62 7.38,10.18 7.36,10.16 7.34,10.14 7.32,10.12 0.38,10.12 0.38,5.63 0.86,5.14 0.88,5.12 0.88,4.03 4.13,0.78 9.32,0.78 9.32,1.82 9.34,1.84 9.46,1.96 9.48,1.98 14.72,1.98 14.74,1.96 14.76,1.94 14.78,1.92
  pour Top: 7.36,10.16 7.34,10.14 7.32,10.12 0.38,10.12 0.38,5.88 0.5,5.88 0.51,5.88 0.51,5.88 0.52,5.88 0.53,5.87 0.54,5.87 0.54,5.86 0.54,5.86 0.55,5.85 0.56,5.84 0.56,5.84 0.56,5.84 0.57,5.83 1.77,3.14 3.05,1.46 4.72,0.57 7.41,0.18 9.42,0.18 9.32,1.98 9.32,1.98 9.32,2 9.32,2.01 9.32,2.01 9.32,2.02 9.33,2.03 9.33,2.04 9.33,2.04 9.34,2.04 9.34,2.05 9.35,2.06 9.36,2.06 9.36,2.06 9.37,2.07 9.38,2.08 9.38,2.08 9.38,2.08 9.4,2.08 9.41,2.08 9.41,2.08 14.72,2.08 14.74,2.06 14.76,2.04 14.78,2.02 14.78,0.28 20.22,0.28 20.22,2.02 20.24,2.04 20.26,2.06 20.28,2.08 25.72,2.08 25.74,2.06 25.76,2.04 25.78,2.02 25.78,0.28 31.23,0.28 31.32,2 31.32,2.02 31.32,2.02 31.32,2.02 31.33,2.03 31.34,2.04 31.34,2.04 31.34,2.05 31.35,2.06 31.36,2.06 31.36,2.07 31.36,2.07 31.37,2.07 31.38,2.08 31.39,2.08 31.39,2.08 31.4,2.08 36.62,2.08 36.64,2.06 36.66,2.04 36.68,2.02 36.68,0.28 40.1,0.28 40.51,0.31 40.92,0.4 41.3,0.55 41.66,0.76 42.62,1.5 43.49,2.34 44.27,3.26 44.96,4.27 45.53,5.33 45.68,5.71 45.78,6.09 45.83,6.49 45.82,6.88 45.82,6.88 45.82,6.9 45.82,6.91 45.82,6.91 45.82,29.07 43.47,31.42 35.23,31.42 33.64,29.84 33.62,29.82 33.58,29.82 33.56,29.84 32.34,31.06 32.32,31.08 32.32,33.97 31.57,34.72 6.98,34.72 6.96,34.74 6.87,34.82 6.7,34.82 5.95,34.78 5.21,34.64 4.49,34.42 3.81,34.11 3.16,33.72 2.57,33.26 2.04,32.73 1.58,32.14 1.19,31.49 0.88,30.81 0.66,30.09 0.52,29.35 0.48,28.6 0.48,24.68 7.32,24.68 7.34,24.66 7.36,24.64 7.38,24.62 7.38,10.18
  pour Route2: 14.66,1.94 14.68,1.92 14.68,0.28 20.23,0.28 20.32,2 20.32,2.02 20.32,2.02 20.32,2.02 20.33,2.03 20.34,2.04 20.34,2.04 20.34,2.05 20.35,2.06 20.36,2.06 20.36,2.07 20.36,2.07 20.37,2.07 20.38,2.08 20.39,2.08 20.39,2.08 20.4,2.08 25.72,2.08 25.74,2.06 25.76,2.04 25.78,2.02 25.78,0.38 31.23,0.38 31.32,2 31.32,2.02 31.32,2.02 31.32,2.02 31.33,2.03 31.34,2.04 31.34,2.04 31.34,2.05 31.35,2.06 31.36,2.06 31.36,2.07 31.36,2.07 31.37,2.07 31.38,2.08 31.39,2.08 31.39,2.08 31.4,2.08 36.62,2.08 36.64,2.06 36.66,2.04 36.68,2.02 36.68,0.28 40.78,0.38 42.96,1.36 44.63,3.04 45.72,5.81 45.72,29.09 45.54,29.92 33.61,29.92 33.61,29.92 33.6,29.92 33.58,29.92 33.58,29.92 33.58,29.92 33.57,29.93 33.56,29.94 33.56,29.94 33.55,29.94 33.54,29.95 33.54,29.96 33.53,29.96 32.45,31.15 32.44,31.16 32.44,31.16 32.43,31.16 32.43,31.17 32.42,31.18 32.42,31.19 32.42,31.19 32.42,31.2 32.33,34.72 6.01,34.72 3.64,33.83 1.06,31.36 0.38,29.78 0.38,24.68 7.1,24.68 7.11,24.68 7.11,24.68 7.12,24.68 7.13,24.67 7.14,24.66 7.14,24.66 7.14,24.66 7.15,24.65 7.16,24.64 7.16,24.64 7.16,24.64 7.17,24.63 7.18,24.62 7.18,24.62 7.18,24.62 7.18,24.6 7.28,10.22 7.28,10.22 7.28,10.2 7.28,10.19 7.28,10.19 7.28,10.18 7.27,10.17 7.26,10.16 7.26,10.16 7.26,10.16 7.25,10.15 7.24,10.14 7.24,10.14 7.24,10.14 7.23,10.13 7.22,10.12 7.22,10.12 7.22,10.12 7.2,10.12 7.19,10.12 7.19,10.12 0.28,10.12 0.38,5.71 0.87,4.04 2.95,1.56 4.73,0.57 6.01,0.38 9.42,0.28 9.42,1.92 9.44,1.94 9.46,1.96 9.48,1.98 14.62,1.98 14.64,1.96
  pour Top: 7.36,10.16 7.34,10.14 7.32,10.12 0.38,10.12 0.38,5.61 0.87,3.94 3.05,1.36 4.82,0.47 7.6,0.18 9.42,0.18 9.32,1.98 9.32,1.98 9.32,2 9.32,2.01 9.32,2.01 9.32,2.02 9.33,2.03 9.33,2.04 9.33,2.04 9.34,2.04 9.34,2.05 9.35,2.06 9.36,2.06 9.36,2.06 9.37,2.07 9.38,2.08 9.38,2.08 9.38,2.08 9.4,2.08 9.41,2.08 9.41,2.08 14.72,2.08 14.74,2.06 14.76,2.04 14.78,2.02 14.78,0.28 20.22,0.28 20.22,2.02 20.24,2.04 20.26,2.06 20.28,2.08 25.6,2.08 25.61,2.08 25.61,2.08 25.62,2.08 25.63,2.07 25.64,2.07 25.64,2.07 25.64,2.06 25.65,2.06 25.66,2.05 25.66,2.04 25.66,2.04 25.67,2.03 25.68,2.02 25.68,2.02 25.68,2.02 25.68,2 25.77,0.28 31.23,0.28 31.32,2 31.32,2.02 31.32,2.02 31.32,2.02 31.33,2.03 31.34,2.04 31.34,2.04 31.34,2.05 31.35,2.06 31.36,2.06 31.36,2.07 31.36,2.07 31.37,2.07 31.38,2.08 31.39,2.08 31.39,2.08 31.4,2.08 36.62,2.08 36.64,2.06 36.66,2.04 36.68,2.02 36.68,0.28 40.78,0.38 43.65,2.16 45.33,4.43 45.82,6.71 45.82,26.2 45.37,30.52 33.58,30.52 33.56,30.54 33.54,30.56 33.52,30.58 33.52,32.87 31.67,34.72 6.71,34.72 4.82,34.43 3.54,33.84 1.16,31.45 0.47,30.18 0.18,28.39 0.18,24.58 7.32,24.58 7.34,24.56 7.36,24.54 7.38,24.52 7.38,10.18
HAPTIC_EN  (via drill 0.15)
  Top 0.15: IC2.A1 40.6,27.8 v40.5,27.7 | U1.P$U1 19.15,16.55 v18.6,17.1
  Bottom 0.15: v40.5,27.7 39.9,27.1 19.6,27.1 17.5,25 17.5,18.2 v18.6,17.1
IMU_INT1
  Top 0.15: U1.P$N1 18.15,17.55 17.75,17.95 IC3.5
IMU_INT2  (via drill 0.15)
  Top 0.15: v19,18 18.32,18 17.88,18.45 IC3.6
  Bottom 0.15: U1.P$P2 19.7,17.3 v19,18
  other vias: 20.75,17.3
LX1  (via drill 0.2, 0.3)
  Top 0.15: IC9.B2 IC9.B3 7.4,27.7 7.8,28.1 v8.3,28.1 | v0.9,27.8 1.57,27.13 L7.1
  Bottom 0.15: v8.3,28.1 1.2,28.1 v0.9,27.8
LX2  (via drill 0.3)
  Top 0.15: IC9.D2 IC9.D3 7.5,26.9 7.8,27.2 v8.4,27.2 | v4.9,25.1 4.73,25.1 L7.2
  Bottom 0.15: v8.4,27.2 6.1,24.9 5,24.9 4.9,25 v4.9,25.1
MOSI  (via drill 0.15)
  Top 0.15: v18.15,22.3 18.05,22.4 15.5,22.4 12.8,19.7 v12,19.7 | v11.9,16.8 11.85,16.75 J1.14
  Bottom 0.15: U1.P$B13 23.5,21.1 21.8,22.8 18.65,22.8 v18.15,22.3 | v12,19.7 11.4,19.1 11.4,17.3 v11.9,16.8
  other vias: 23.5,20.55
N$1  (via drill 0.3)
  Top 0.15: IC9.D1 6.3,26.9 5.6,27.6 v5.6,28.6 | R4.1 3.1,31.2 v2.2,32.1
  Bottom 0.15: v5.6,28.6 3,28.6 1.7,29.9 1.7,31.6 v2.2,32.1
N$2  (via drill 0.3)
  Top 0.15: IC9.E1 5.7,26.5 v5.6,26.6 | v1.2,30 1.3,30.1 R2.1
  Bottom 0.15: v5.6,26.6 1,26.6 0.4,27.2 0.4,28.8 1.2,29.6 v1.2,30
N$3
  Top 0.15: L3.1 L2.2
N$4  (via drill 0.15)
  Top 0.15: C2-EP-DR.2 14.6,3.2 14.6,5.3 14.2,5.7 13.3,5.7 | 13.3,5.7 12.55,6.45 Q3.3 12.75,7.6 18.65,7.6 D5.2 | 13.3,5.7 v11.4,5.7 | v2.8,7.2 1.91,7.2 L5.1
  Bottom 0.15: v11.4,5.7 4.3,5.7 v2.8,7.2
N$5  (via drill 0.15)
  Top 0.15: C1.1 31.74,18.86 X1.1 30.12,18.93 v30.1,18.95 | U1.P$B24 28.35,20.55 v28.5,20.4
  Bottom 0.15: v28.5,20.4 28.7,20.4 30.1,19 v30.1,18.95
N$6
  Top 0.15: C2-EP-DR.1 18.3,3.5 18.8,3.5 19.45,4.15 19.45,4.5 D4.2 D2.1
N$7
  Top 0.15: R_TYPE_SEL.2 R1_EP_DR.1 5.93,3.2 SJ1.2
N$8
  Top 0.15: IC3.1 16.02,17.4 R3.1
N$9
  Top 0.152: J1.24 12.7,11.75 EPD_C12.2
N$10
  Top 0.15: U1.P$A18 24.75,21.89 C13.1
N$13
  Top 0.152: EPD_C2.2 12.6,21.75 J1.4
N$14
  Top 0.152: EPD_C1.2 12.79,21.25 J1.5
N$16
  Top 0.15: IC2.A2 41.8,28.88 C32.2
N$18
  Top 0.15: J4.B5 21.25,26.73 R2_USB.1
N$19
  Top 0.15: J4.A5 24.25,26.73 R1_USB.2
N$21
  Top 0.15: U1.P$AC5 21.4,14.95 20.35,14.95 19.8,14.4 C20.1
N$28
  Top 0.15: EPD_C6.2 15.64,12.96 13.85,14.75 J1.18
N$29
  Top 0.15: EPD_C7.2 15.64,12.25 15.3,12.6 15.3,12.9 13.8,14.4 12.3,14.4 12.1,14.2 10.68,14.2 J1.19
N$30
  Top 0.15: J1.20 12.05,13.75 12.4,14.1 13.7,14.1 15,12.8 15,12.2 15.64,11.55 EPD_C8.2
N$32
  Top 0.152: J1.22 12.79,12.75 EPD_C10.2
N$40  (via drill 0.15)
  Top 0.15: C2.1 33.14,20.05 X1.3 33.12,20.27 v31.9,21.5 | U1.P$A23 v28.45,21.05
  Bottom 0.15: v28.45,21.05 29.45,21.05 29.9,21.5 v31.9,21.5
N$68
  Top 0.15: U1.P$B3 20,21.55 L2.1
OUT+
  Top 0.15: IC2.A3 42.7,28.2 42.7,28.9 42.3,29.3 41.4,29.3 37.9,25.8 OP.TP
OUT-
  Top 0.152: ON.TP 42.3,25.5 IC2.C3
P0.00/XL1  (via drill 0.15)
  Top 0.15: C17.2 30.29,25.38 X2.1 30.33,26.37 v30.1,26.6 | U1.P$D2 20.6,19.95 v20.6,20.3 | v19.2,21.7 19.5,22 19.5,23.6 v19.8,23.9
  Bottom 0.15: v20.6,20.3 v19.2,21.7 | v19.8,23.9 22.7,26.8 29.9,26.8 v30.1,26.6
P0.01/XL2  (via drill 0.15)
  Top 0.15: X2.2 28.28,25.77 27.8,25.25 26.98,25.29 26.9,25.21 C18.2 26.6,24.9 v26.2,24.5 | U1.P$F2 20.6,19.3 v20.3,19.6 | v19.05,22.35 19.05,23.25 v18.8,23.5
  Bottom 0.15: v20.3,19.6 19.9,20 19.9,20.6 19.3,21.2 19.2,21.2 18.8,21.6 18.8,22.1 v19.05,22.35 | v18.8,23.5 25.2,23.5 v26.2,24.5
P0.13
  Top 0.15: C30.2 R5.1 19.6,3 20.87,4.27 SW_UP.2 21.7,5.4 22.15,5.85 22.15,14.45 U1.P$AD8
P0.14  (via drill 0.15)
  Top 0.15: C31.2 8.11,3.07 R8.1 9.9,4.27 SW_ENT.2 10.6,5.1 10.8,5.3 v12,5.3 | v22.55,14.15 v22.55,9.85
  Bottom 0.15: v12,5.3 12.7,6 14.4,6 14.8,6.4 14.8,9.1 15.2,9.5 22.2,9.5 v22.55,9.85 | U1.P$AC9 22.55,15 v22.55,14.15
  other vias: 22.5,15.05
P1.01  (via drill 0.15)
  Top 0.15: R_PWR_EPD.1 27.7,4.85 Q1.1
  Top 0.152: v26.3,13.7 26.3,6.25 Q1.1
  Bottom 0.152: U1.P$Y23 26.25,13.75 v26.3,13.7
  other vias: 26.25,15.8
P1.02  (via drill 0.15)
  Top 0.15: R7.1 30.98,3.71 | 30.98,3.71 31.3,4.27 SW_DN.2 v32.6,9.8 | C29.2 30.97,3.7 30.98,3.71 | v31.65,15.95 26.85,15.95 U1.P$W24
  Bottom 0.15: v31.65,15.95 32.6,15 v32.6,9.8
PMIC_INT  (via drill 0.15)
  Top 0.15: v6.5,33.5 6.3,33.3 IC1.A1 | v15.1,23.4 15.3,23.6 18.2,23.6 18.6,23.2 18.6,20.1 v19.7,19
  Bottom 0.15: v6.5,33.5 10,33.5 16.2,27.3 16.2,26.6 15.1,25.5 v15.1,23.4 | v19.7,19 19.9,18.8 20.8,18.8 21.1,18.5 21.1,17 20.9,16.8 U1.P$T2
  other vias: 20.75,16.8
PREVGH
  Top 0.15: D5.1 12.4,8.4 9.4,11.4 9.4,12.3 10.35,13.25 J1.21
  Top 0.152: J1.21 12.6,13.25 EPD_C9.2
PREVGL  (via drill 0.15)
  Top 0.15: D2.2 v14.3,6.5 | v9.8,11.9 10.15,12.25 J1.23
  Top 0.152: J1.23 12.89,12.25 EPD_C11.2
  Bottom 0.15: v14.3,6.5 9.8,11 v9.8,11.9
RESE  (via drill 0.15)
  Top 0.15: R1_EP_DR.2 9,5.3 Q3.2 9.95,6.75 v9.1,7.6 | v9.6,22.3 10.57,22.3 J1.3
  Bottom 0.15: v9.1,7.6 9.1,21.9 9.5,22.3 v9.6,22.3
RESET  (via drill 0.15)
  Top 0.15: RESET.TP 43.8,19 40.89,16.09 J2.6 40.97,15.73 v41.6,15.1 | v26.8,13.3 29.7,13.3 33.1,9.9 38.8,9.9 v39.4,10.5
  Bottom 0.15: U1.P$AC13 25.25,13.3 v26.8,13.3 | v39.4,10.5 39.9,11 41.6,11 43.3,12.7 43.3,14.2 42.4,15.1 v41.6,15.1
  other vias: 23.5,15.05
SCK  (via drill 0.15)
  Top 0.15: U1.P$A12 23.25,22.05 v23.5,22.3 | v18.15,23.1 15.8,23.1 13,20.3 v12,20.3 | v9.7,17.4 9.85,17.25 J1.13
  Bottom 0.15: v23.5,22.3 22.7,23.1 v18.15,23.1 | v12,20.3 9.7,18 v9.7,17.4
SCL  (via drill 0.15)
  Top 0.15: TP_SCL.TP 4.3,31.82 R4.2 R17.2 | IC1.B1 4.4,32.4 TP_SCL.TP | IC3.12 15.55,17.95 v14.7,18.8 | v15.8,26.7 15.8,27.2 15.35,27.65 U3.7 | IC2.C1 41.1,26.6 40.3,26.6 37.7,24 34.6,24 33.8,24.8 v33.2,24.8 | v21.3,24.8 20.6,24.8 v18.7,26.7 | v14.7,25.1 17,25.1 v17.6,25.7 17.35,25.45 17.35,25.05 v17.9,24.5 | TP_SCL.TP 6.35,34.55 v8.4,34.55 | v12.4,31.8 12.4,30.5 12.7,30.2 v12.7,29.6 | v11.6,29.2 11.7,29.1 v11.7,27.1
  Bottom 0.15: v14.7,18.8 v14.7,25.1 14.7,25.6 | 14.7,25.6 v15.8,26.7 | v33.2,24.8 33.1,24.9 21.4,24.9 v21.3,24.8 | v18.7,26.7 18.6,26.7 v17.6,25.7 | U1.P$M2 19.7,17.8 17.8,19.7 17.8,24.4 v17.9,24.5 | v8.4,34.55 9.65,34.55 v12.4,31.8 | v12.7,29.6 12.4,29.3 11.7,29.3 v11.6,29.2 | v11.7,27.1 13.2,25.6 14.7,25.6
  other vias: 20.75,17.8
SDA  (via drill 0.15)
  Top 0.15: IC3.2 16.55,16.95 16.4,16.8 14.6,16.8 13.7,17.7 13.7,18.4 16.5,21.2 | 16.5,21.2 17.4,21.2 18,20.6 18,19.7 19.65,18.05 U1.P$L1 | 16.6,26.9 15.35,28.15 U3.8 14.63,28.5 14.2,28.5 v14,28.7 | 16.6,26.9 v16.6,26.7 | v16.5,21.7 16.5,21.2 | v2.5,30.8 2.38,30.68 R2.2 2.38,28.88 SDA.TP 2.6,28.3 R18.2 | v5.5,31.8 5.7,32 IC1.C1 | v29.2,25.25 29.2,24.1 28.8,23.7 27.4,23.7 27,24.1 20.7,24.1 17.9,26.9 16.6,26.9
  Bottom 0.15: v16.6,26.7 16.6,21.8 v16.5,21.7 | v2.5,30.8 4.5,30.8 | 4.5,30.8 v5.5,31.8 | IC2.B2 41.3,26.8 31.2,26.8 30.1,25.7 29.65,25.7 v29.2,25.25 | 4.5,30.8 5.2,30.1 8.3,30.1 9.7,28.7 v14,28.7
  other vias: 41.8,27.3
SWDCLK
  Top 0.15: J2.4 38.7,16.65 38.7,18.5 | 38.7,18.5 39.5,19.3 41.9,19.3 42.4,19.8 42.4,22.8 SWDCLK.TP | U1.P$AA24 32.75,15.55 36.4,19.2 38,19.2 38.7,18.5
SWDIO
  Top 0.15: U1.P$AC24 32.65,15.05 33.6,16 38.08,16 J2.2 39,15.08 39,13.6 38.7,13.3 38.7,11.3 39.1,10.9 42.2,10.9 SWDIO.TP
SWO  (via drill 0.15)
  Top 0.15: U1.P$AD22 26.2,14.1 29.5,14.1 v33.2,10.4 | v34.2,9.4 40.8,9.4 SWO.TP
  Bottom 0.15: v33.2,10.4 v34.2,9.4
TS/MR
  Top 0.15: R9.2 5.88,31.6 IC1.D1
VBAT
  Top 0.305: C27.2 12.2,26.21 12.2,26.9 12.45,27.15 U3.3 U3.2 12.45,27.65 12.2,27.9 12.2,30 VBAT.TP 10.21,31.98 C37.2 6.71,31.98 IC1.C2
VBUS  (via drill 0.15)
  Top 0.15: 30.71,32.78 C43.1 | C21.1 20.75,11.25
  Top 0.305: 30.71,32.78 C42.2 29.09,32.78 28.7,32.4 28.7,29 28.65,28.95 | 28.65,28.95 27.7,28 25.7,28 25.4,28.3 J4.A4_B9 25.4,29.5 24.6,30.3 21.4,30.3 20.6,29.5 J4.A9_B4 20.6,28.1 v20,27.5 | 20.75,11.25 U1.P$AD2 | IC1.A2 8,34.1 12.9,34.1 | 12.9,34.1 13.3,34.5 14.8,34.5 15.3,34 D3.5 | 12.9,34.1 12.4,33.6 C38.2 | v17.8,27.5 15.7,29.6 14.3,29.6 12.9,31 12.9,34.1 | C21.1 v21.7,11.2 | v31.9,23.8 31.9,25.7 28.65,28.95
  Bottom 0.305: v20,27.5 v17.8,27.5 | v21.7,11.2 26.7,11.2 27.5,12 27.5,22.3 29,23.8 v31.9,23.8
VREG  (via drill 0.15)
  Top 0.15: IC1.B2 7.4,32.4 8.5,33.5 C39.1 v8.8,32.6 | IC9.A1 IC9.A2 IC9.A3 7.3,28.7 8.5,29.9 | 8.5,29.9 9.6,29.9 10.91,28.59 C23.1 10.91,26.59 C24.2 13.2,24.3 VREG.TP | 8.5,29.9 8.5,30.1 v8.8,30.4
  Bottom 0.15: v8.8,32.6 v8.8,30.4

## Text on the board
tPlace: SCL | R4 | R2 | R17 | R7 | R18 | R2_USB | R1_USB | R3 | J1 | R2_EP_DR | R_TYPE_SEL | R1_EP_DR | L5 | R8 | R5 | R7 | R_PWR_EPD